# EAGLE board DrinkbotPCB (EAGLE 7.1.0)
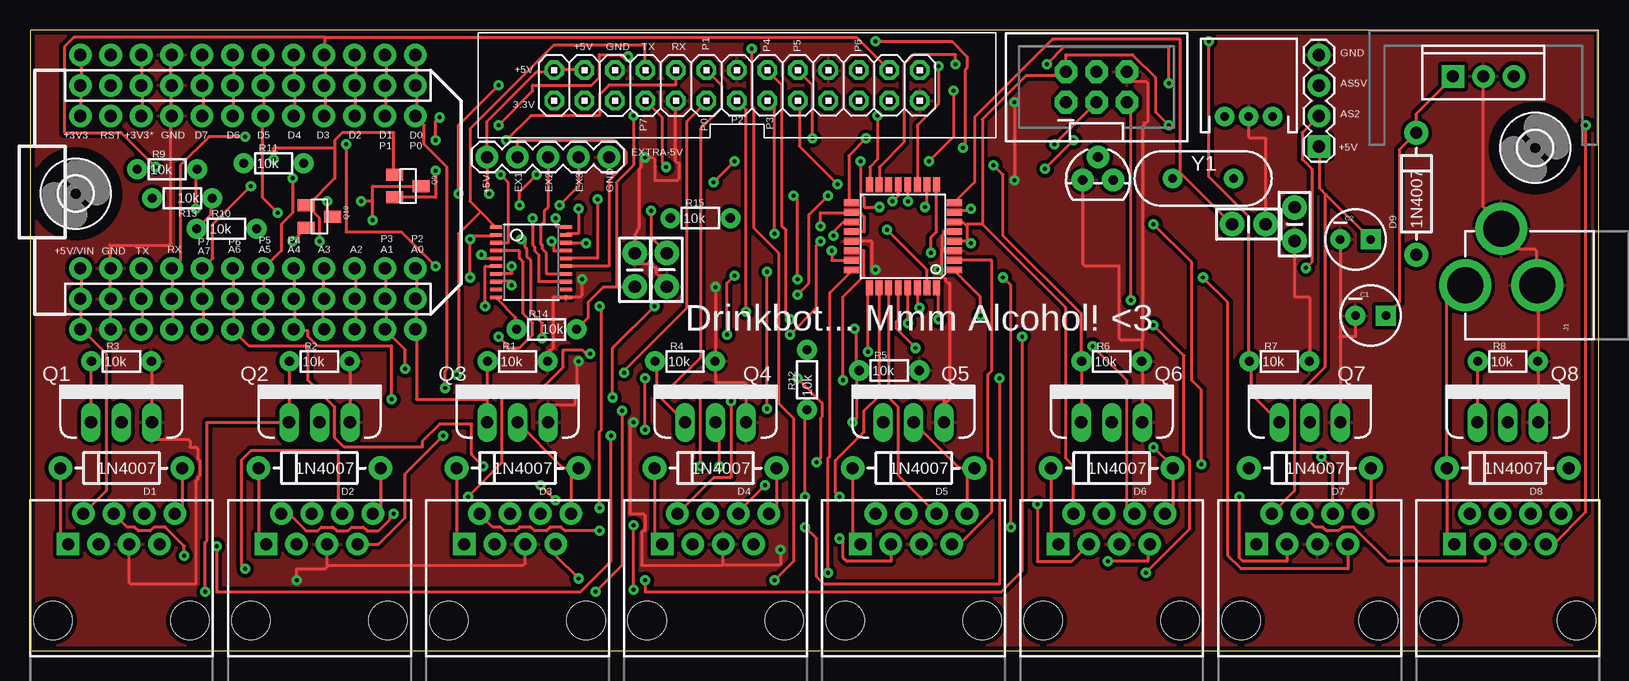
[diagram p0: board, top side]
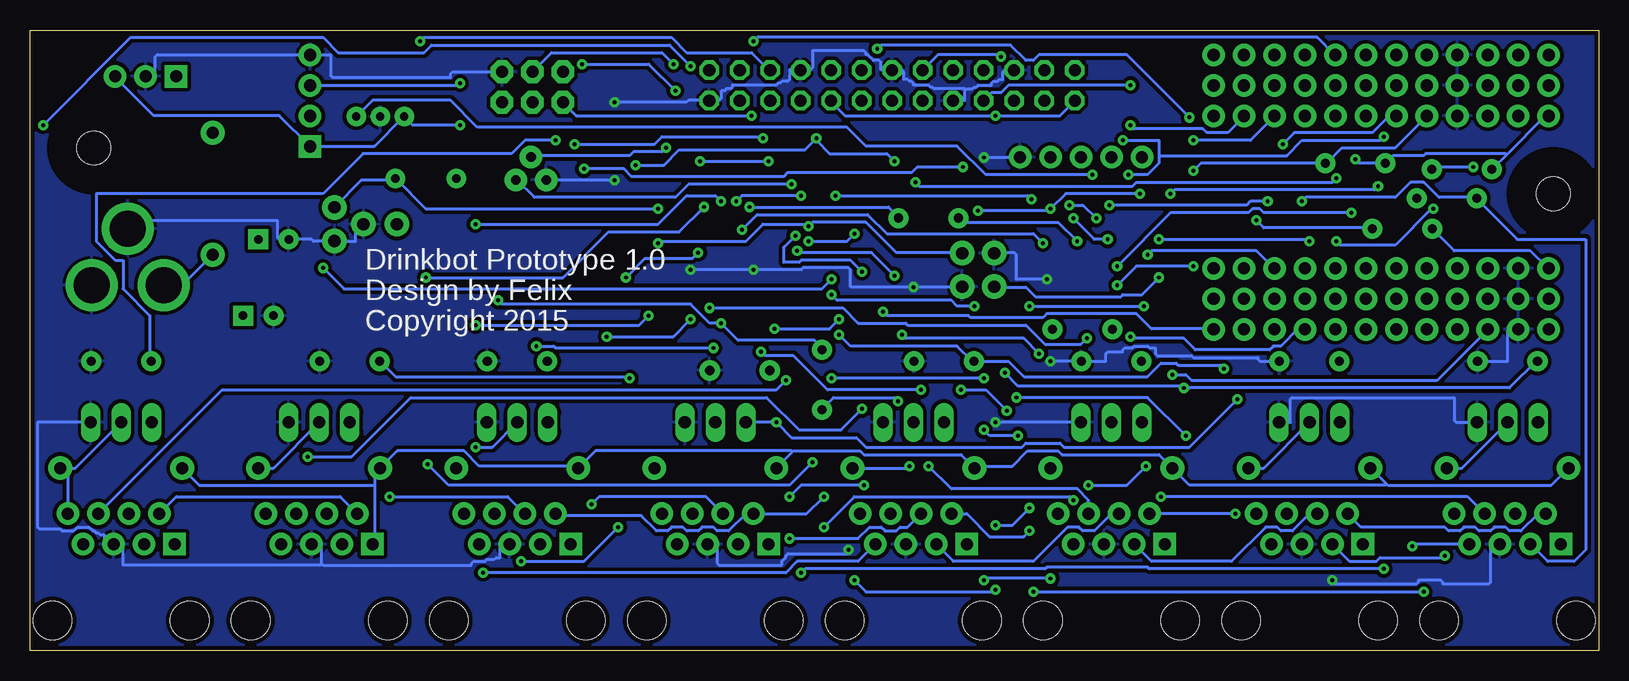
[diagram p1: board, bottom side, seen from below]

Size 130.79 x 51.74 mm. Coordinates in mm from the lower left corner, seen from the top.
Outline: 0,0 130.79,0 130.79,51.74 0,51.74 0,0
Copper layers (1*16): Top 0.0356mm / dielectric 1.5011mm / Bottom 0.0356mm
Design rules "Test2": minimum track width 10mil, minimum drill 13mil, track to track 10mil, track to pad 10mil, pad to pad 10mil, via to via 10mil, smd to smd 10mil, copper to edge 15mil, drill to drill 6mil, minimum pad ring 12mil, minimum via ring 10mil, stop-mask expansion 4mil, vias tented up to drill 15mil, thermal gap 10mil

## Footprints (pad centres in the part's own frame; a part is rotated, then mirrored left to right if it is on the bottom)
CPOL-RADIAL-10UF-25V = drill 0.7 pad 1.651 square: 1 1.27,0 | drill 0.7 pad 1.651: 2 -1.27,0
CAP-PTH-SMALL-KIT = drill 1.016 pad 2.032: 1 -1.397,0; 2 1.397,0
DIODE-1N4001 = drill 1 pad 1.981: A -5.08,0; C 5.08,0
1X05 = drill 1.016 pad 1.88: 1 0,0; 2 2.54,0; 3 5.08,0; 4 7.62,0; 5 10.16,0
2X13 = drill 1.016 octagon: 1 -15.24,-1.27; 2 -15.24,1.27; 3 -12.7,-1.27; 4 -12.7,1.27; 5 -10.16,-1.27; 6 -10.16,1.27; 7 -7.62,-1.27; 8 -7.62,1.27; 9 -5.08,-1.27; 10 -5.08,1.27; 11 -2.54,-1.27; 12 -2.54,1.27; 13 0,-1.27; 14 0,1.27; 15 2.54,-1.27; 16 2.54,1.27; 17 5.08,-1.27; 18 5.08,1.27; 19 7.62,-1.27; 20 7.62,1.27; 21 10.16,-1.27; 22 10.16,1.27; 23 12.7,-1.27; 24 12.7,1.27; 25 15.24,-1.27; 26 15.24,1.27
TO220-IGO = drill 1 pad 1.88: GND 0,0; OUT 2.54,0 | drill 1 pad 1.88 square: IN -2.54,0
POWER_JACK_PTH = drill 2.997 pad 4.318: GND 0,7.7; GNDBREAK 4.7,10.7; PWR 0,13.7
JST-3-PTH = drill 0.7 pad 1.626: 1 -2,-5; 2 0,-5; 3 2,-5
2X3-SHROUDED = drill 1.016 pad 1.88 octagon: 1 -1.27,2.54; 2 1.27,2.54; 3 -1.27,0; 4 1.27,0; 5 -1.27,-2.54; 6 1.27,-2.54
1X04 = drill 1.016 pad 1.88 square: 1 0,0 | drill 1.016 pad 1.88: 2 2.54,0; 3 5.08,0; 4 7.62,0
TO220V = drill 1.016 long: 1 -2.54,0; 2 0,0; 3 2.54,0
SOT23 = smd 1 x 1.4: 1 -0.95,-1.1; 2 0.95,-1.1; 3 0,1.1
1/6W-RES = drill 0.762 pad 1.676: 1 -2.5,0; 2 2.5,0
TQFP32-08 = smd 1.27 x 0.559: 1 -4.293,2.8; 2 -4.293,2; 3 -4.293,1.2; 4 -4.293,0.4; 5 -4.293,-0.4; 6 -4.293,-1.2; 7 -4.293,-2; 8 -4.293,-2.8; 17 4.293,-2.8; 18 4.293,-2; 19 4.293,-1.2; 20 4.293,-0.4; 21 4.293,0.4; 22 4.293,1.2; 23 4.293,2; 24 4.293,2.8 | smd 0.559 x 1.27: 9 -2.8,-4.293; 10 -2,-4.293; 11 -1.2,-4.293; 12 -0.4,-4.293; 13 0.4,-4.293; 14 1.2,-4.293; 15 2,-4.293; 16 2.8,-4.293; 25 2.8,4.293; 26 2,4.293; 27 1.2,4.293; 28 0.4,4.293; 29 -0.4,4.293; 30 -1.2,4.293; 31 -2,4.293; 32 -2.8,4.293
TSSOP20 = smd 0.305 x 0.991: 1 -2.925,-2.918; 2 -2.275,-2.918; 3 -1.625,-2.918; 4 -0.975,-2.918; 5 -0.325,-2.918; 6 0.325,-2.918; 7 0.975,-2.918; 8 1.625,-2.918; 9 2.275,-2.918; 10 2.925,-2.918; 11 2.925,2.918; 12 2.275,2.918; 13 1.625,2.918; 14 0.975,2.918; 15 0.325,2.918; 16 -0.325,2.918; 17 -0.975,2.918; 18 -1.625,2.918; 19 -2.275,2.918; 20 -2.925,2.918
SPARK_CORE_STACKABLE = drill 1.016 pad 1.88: 1 -8.89,13.97; 2 -8.89,11.43; 3 -8.89,8.89; 4 -8.89,6.35; 5 -8.89,3.81; 6 -8.89,1.27; 7 -8.89,-1.27; 8 -8.89,-3.81; 9 -8.89,-6.35; 10 -8.89,-8.89; 11 -8.89,-11.43; 12 -8.89,-13.97; 13 8.89,-13.97; 14 8.89,-11.43; 15 8.89,-8.89; 16 8.89,-6.35; 17 8.89,-3.81; 18 8.89,-1.27; 19 8.89,1.27; 20 8.89,3.81; 21 8.89,6.35; 22 8.89,8.89; 23 8.89,11.43; 24 8.89,13.97; #1 -6.35,13.97; #2 -6.35,11.43; #3 -6.35,8.89; #4 -6.35,6.35; #5 -6.35,3.81; #6 -6.35,1.27; #7 -6.35,-1.27; #8 -6.35,-3.81; #9 -6.35,-6.35; #10 -6.35,-8.89; #11 -6.35,-11.43; #12 -6.35,-13.97; #13 11.43,-13.97; #14 11.43,-11.43; #15 11.43,-8.89; #16 11.43,-6.35; #17 11.43,-3.81; #18 11.43,-1.27; #19 11.43,1.27; #20 11.43,3.81; #21 11.43,6.35; #22 11.43,8.89; #23 11.43,11.43; #24 11.43,13.97; @1 -11.43,13.97; @2 -11.43,11.43; @3 -11.43,8.89; @4 -11.43,6.35; @5 -11.43,3.81; @6 -11.43,1.27; @7 -11.43,-1.27; @8 -11.43,-3.81; @9 -11.43,-6.35; @10 -11.43,-8.89; @11 -11.43,-11.43; @12 -11.43,-13.97; @13 6.35,-13.97; @14 6.35,-11.43; @15 6.35,-8.89; @16 6.35,-6.35; @17 6.35,-3.81; @18 6.35,-1.27; @19 6.35,1.27; @20 6.35,3.81; @21 6.35,6.35; @22 6.35,8.89; @23 6.35,11.43; @24 6.35,13.97
TO-92 = drill 0.813 pad 1.88: 1 -1.27,0; 2 0,1.905; 3 1.27,0
2,8 = hole 2.8: 0,0
RJ45-8 = drill 1 pad 1.88 square: 1 -4.445,6.35 | drill 1 pad 1.88: 2 -3.175,8.89; 3 -1.905,6.35; 4 -0.635,8.89; 5 0.635,6.35; 6 1.905,8.89; 7 3.175,6.35; 8 4.445,8.89 | hole 3.2: -5.715,0; 5.715,0
HC49US = drill 0.7 pad 1.651: 1 -2.54,0; 2 2.54,0

## Placement (x,y rotation side)
C1  10uF  [CPOL-RADIAL-10UF-25V]  111.76,27.94 0 top
C2  10uF  [CPOL-RADIAL-10UF-25V]  110.49,34.29 0 top
C3  22pf  [CAP-PTH-SMALL-KIT]  105.41,35.56 90 top
C4  22pf  [CAP-PTH-SMALL-KIT]  101.6,35.56 180 top
C5  0.1uF  [CAP-PTH-SMALL-KIT]  53.09,31.75 270 top
C6  0.1uF  [CAP-PTH-SMALL-KIT]  50.42,31.75 90 top
D1  1N4007  [DIODE-1N4001]  7.62,15.24 180 top
D2  1N4007  [DIODE-1N4001]  24.13,15.24 180 top
D3  1N4007  [DIODE-1N4001]  40.64,15.24 180 top
D4  1N4007  [DIODE-1N4001]  57.15,15.24 180 top
D5  1N4007  [DIODE-1N4001]  73.66,15.24 180 top
D6  1N4007  [DIODE-1N4001]  90.17,15.24 180 top
D7  1N4007  [DIODE-1N4001]  106.68,15.24 180 top
D8  1N4007  [DIODE-1N4001]  123.19,15.24 180 top
D9  1N4007  [DIODE-1N4001]  115.57,38.1 90 top
EXTRA-5V  [1X05]  48.26,41.15 180 top
GPIO_HEADER1  RPI-GPIO  [2X13]  58.93,47.12 0 top
IC1  L7805-5V  [TO220-IGO]  121.16,47.88 0 top
J1  12V-PWR  [POWER_JACK_PTH]  133.35,30.48 90 top
JP1  RGBLED1  [JST-3-PTH]  101.6,49.53 0 top
JP3  ISP  [2X3-SHROUDED]  88.9,46.99 90 top
JP4  ALCOHOL  [1X04]  107.44,42.04 90 top
Q1  FQP30N06L  [TO220V]  7.62,19.05 0 top
Q2  FQP30N06L  [TO220V]  24.13,19.05 0 top
Q3  FQP30N06L  [TO220V]  40.64,19.05 0 top
Q4  FQP30N06L  [TO220V]  57.15,19.05 0 top
Q5  FQP30N06L  [TO220V]  73.66,19.05 0 top
Q6  FQP30N06L  [TO220V]  90.17,19.05 0 top
Q7  FQP30N06L  [TO220V]  106.68,19.05 0 top
Q8  FQP30N06L  [TO220V]  123.19,19.05 0 top
Q9  BSS138  [SOT23]  31.5,38.73 270 top
Q10  BSS138  [SOT23]  24.13,36.2 270 top
R1  10k  [1/6W-RES]  40.64,24.13 0 top
R2  10k  [1/6W-RES]  24.13,24.13 0 top
R3  10k  [1/6W-RES]  7.62,24.13 0 top
R4  10k  [1/6W-RES]  54.61,24.13 0 top
R5  10k  [1/6W-RES]  71.63,23.37 0 top
R6  10k  [1/6W-RES]  90.17,24.13 0 top
R7  10k  [1/6W-RES]  104.14,24.13 0 top
R8  10k  [1/6W-RES]  123.19,24.13 0 top
R9  10k  [1/6W-RES]  11.43,40.13 0 top
R10  10k  [1/6W-RES]  16.38,35.18 0 top
R11  10k  [1/6W-RES]  20.32,40.64 0 top
R12  10k  [1/6W-RES]  64.77,22.61 90 top
R13  10k  [1/6W-RES]  12.7,37.72 180 top
R14  10k  [1/6W-RES]  43.05,26.8 180 top
R15  10k  [1/6W-RES]  55.88,36.07 0 top
U1  ATMEGA328P  [TQFP32-08]  72.77,34.54 180 top
U2  TXB0108  [TSSOP20]  41.78,32.38 270 top
U$1  SPARK-CORE  [SPARK_CORE_STACKABLE]  18.16,38.23 90 top
U$2  TMP  [TO-92]  89.03,39.24 0 top
U$3  [2,8]  125.48,41.91 0 top
U$7  [2,8]  3.81,38.1 0 top
UNI3  RJ45-8PTH  [RJ45-8]  57.15,2.54 0 top
UNIT0  RJ45-8PTH  [RJ45-8]  7.62,2.54 0 top
UNIT1  RJ45-8PTH  [RJ45-8]  24.13,2.54 0 top
UNIT2  RJ45-8PTH  [RJ45-8]  40.64,2.54 0 top
UNIT4  RJ45-8PTH  [RJ45-8]  73.66,2.54 0 top
UNIT5  RJ45-8PTH  [RJ45-8]  90.17,2.54 0 top
UNIT6  RJ45-8PTH  [RJ45-8]  106.68,2.54 0 top
UNIT7  RJ45-8PTH  [RJ45-8]  123.19,2.54 0 top
Y1  16Mhz  [HC49US]  97.79,39.37 0 top

## Library data of the parts
C1 C2 = SparkFun-Passives
C3-C6 = SparkFun-Capacitors
D1-D9 = SparkFun-DiscreteSemi
EXTRA-5V J1 JP1 JP4 UNI3 UNIT0 UNIT1 UNIT2 UNIT4-UNIT7 = SparkFun-Connectors
GPIO_HEADER1 = rpi-header
IC1 = SparkFun-PowerIC
JP3 = SparkFun-Connectors; PROD_ID: CONN-10681
Q1-Q8 = SparkFun-DiscreteSemi; PROD_ID: TRANS-10060
Q9 Q10 = SparkFun-DiscreteSemi; PROD_ID: TRANS-00830
R1-R15 = SparkFun-Resistors
U1 = SparkFun-DigitalIC; PROD_ID: IC-09069
U2 = adafruit
U$1 = Spark
U$2 = SparkFun-Sensors
U$3 U$7 = holes
Y1 = SparkFun-FreqCtrl

## Nets
+3V3: C6.1 GPIO_HEADER1.1 GPIO_HEADER1.17 Q9.1 Q10.1 R9.1 R11.1 R14.1 U2.2 U$1.24 U$1.#24 U$1.@24 U$2.3
+5V: C2.1 C5.1 EXTRA-5V.5 GPIO_HEADER1.2 GPIO_HEADER1.4 IC1.OUT JP1.1 JP3.2 JP4.1 R10.1 R12.1 R13.1 U1.4 U1.6 U1.18 U1.20 U2.19 U$1.1 U$1.#1 U$1.@1 UNI3.2 UNIT0.2 UNIT1.2 UNIT2.2 UNIT4.2 UNIT5.2 UNIT6.2 UNIT7.2
AP0: U1.23 UNIT0.6
AP1: U1.24 UNIT1.6
AP2: U1.25 UNIT2.6
AP3: U1.26 UNI3.6
AP4: U1.27 UNIT4.6
AP5: U1.28 UNIT5.6
AP6: U1.19 UNIT6.6
AP7: U1.22 UNIT7.6
AS2-3V: U2.5 U$1.10 U$1.#10 U$1.@10
AS2-5V: JP4.2 U2.16
AS3V: U2.4 U$1.9 U$1.#9 U$1.@9
AS5V: R15.1 U2.17
AT-RX: U1.30 U2.20
AT-TX: U1.31 U2.18
DP0: U1.12 UNIT0.7
DP1: U1.13 UNIT1.7
DP2: U1.32 UNIT2.7
DP3: U1.1 UNI3.7
DP4: U1.2 UNIT4.7
DP5: U1.9 UNIT5.7
DP6: U1.10 UNIT6.7
DP7: U1.11 UNIT7.7
EXTRA1-3V3: U2.6 U$1.15 U$1.#15 U$1.@15
EXTRA1-5V: EXTRA-5V.4 U2.15
EXTRA2-3V3: U2.7 U$1.18 U$1.#18 U$1.@18
EXTRA2-5V: EXTRA-5V.3 U2.14
EXTRA3-3V3: U2.8 U$1.19 U$1.#19 U$1.@19
EXTRA3-5V: EXTRA-5V.2 U2.13
GND: C1.2 C2.2 C3.1 C4.1 C5.2 C6.2 EXTRA-5V.1 GPIO_HEADER1.6 GPIO_HEADER1.9 GPIO_HEADER1.14 GPIO_HEADER1.20 GPIO_HEADER1.25 IC1.GND J1.GND J1.GNDBREAK JP1.2 JP3.6 JP4.4 Q1.3 Q2.3 Q3.3 Q4.3 Q5.3 Q6.3 Q7.3 Q8.3 R1.2 R2.2 R3.2 R4.2 R5.2 R6.2 R7.2 R8.2 U1.3 U1.5 U1.21 U2.11 U$1.2 U$1.21 U$1.#2 U$1.#21 U$1.@2 U$1.@21 U$2.1 UNI3.5 UNIT0.5 UNIT1.5 UNIT2.5 UNIT4.5 UNIT5.5 UNIT6.5 UNIT7.5
HV1: JP1.3 Q9.3 R10.2
LEDIN0: Q10.3 R13.2 UNIT0.3
LEDOUT0: UNIT0.4 UNIT1.3
LEDOUT1: UNIT1.4 UNIT2.3
LEDOUT2: UNI3.3 UNIT2.4
LEDOUT3: UNI3.4 UNIT4.3
LEDOUT4: UNIT4.4 UNIT5.3
LEDOUT5: UNIT5.4 UNIT6.3
LEDOUT6: UNIT6.4 UNIT7.3
LEDOUT7: UNIT7.4
LV-RX: GPIO_HEADER1.10 U2.3 U$1.4 U$1.#4 U$1.@4
LV-TX: GPIO_HEADER1.8 U2.1 U$1.3 U$1.#3 U$1.@3
MISO: JP3.1 U1.16
MOSI: JP3.4 U1.15
N$1: C1.1 D9.C IC1.IN
N$2: C3.2 U1.7 Y1.2
N$3: C4.2 U1.8 Y1.1
N$5: R14.2 U2.10
N$7: JP4.3 R15.2
PUMP0: GPIO_HEADER1.11 Q1.1 R3.1 U$1.13 U$1.#13 U$1.@13
PUMP1: GPIO_HEADER1.12 Q2.1 R2.1 U$1.14 U$1.#14 U$1.@14
PUMP2: GPIO_HEADER1.13 Q3.1 R1.1 U$1.12 U$1.#12 U$1.@12
PUMP3: GPIO_HEADER1.15 Q4.1 R4.1 U$1.11 U$1.#11 U$1.@11
PUMP4: GPIO_HEADER1.16 Q5.1 R5.1 U$1.8 U$1.#8 U$1.@8
PUMP5: GPIO_HEADER1.18 Q6.1 R6.1 U$1.7 U$1.#7 U$1.@7
PUMP6: GPIO_HEADER1.22 Q7.1 R7.1 U$1.6 U$1.#6 U$1.@6
PUMP7: GPIO_HEADER1.7 Q8.1 R8.1 U$1.5 U$1.#5 U$1.@5
PUMPLEDS: GPIO_HEADER1.24 Q10.2 R9.2 U$1.16 U$1.#16 U$1.@16
RESET: JP3.5 R12.2 U1.29
RGBLED1: Q9.2 R11.2 U$1.20 U$1.#20 U$1.@20
SCK: JP3.3 U1.17
TEMPSENSOR1: U$1.17 U$1.#17 U$1.@17 U$2.2
VDDA: U$1.22 U$1.#22 U$1.@22
VIN12: D1.C D2.C D3.C D4.C D5.C D6.C D7.C D8.C D9.A J1.PWR UNI3.1 UNIT0.1 UNIT1.1 UNIT2.1 UNIT4.1 UNIT5.1 UNIT6.1 UNIT7.1
VOUTPUMP0: D1.A Q1.2 UNIT0.8
VOUTPUMP1: D2.A Q2.2 UNIT1.8
VOUTPUMP2: D3.A Q3.2 UNIT2.8
VOUTPUMP3: D4.A Q4.2 UNI3.8
VOUTPUMP4: D5.A Q5.2 UNIT4.8
VOUTPUMP5: D6.A Q6.2 UNIT5.8
VOUTPUMP6: D7.A Q7.2 UNIT6.8
VOUTPUMP7: D8.A Q8.2 UNIT7.8

## Tracks (layer width: path | path; a pad name or v marks a point on that pad's centre or on a via)
+3V3  (via drill 0.33)
  Top 0.254: 25.4,41.91 25.4,42.55 26.04,43.18 30.32,43.18 30.32,39.69 Q9.1 | 25.4,41.91 25.4,39.37 23.18,37.15 Q10.1 23.18,36.99 24.13,36.04 v24.13,34.13 | U$1.#24 4.29,49.53 4.29,47.15 U$1.24 4.29,46.99 4.29,44.61 U$1.@24 | 25.4,41.91 20.32,41.91 v20.32,40.96 | v36.67,31.11 v36.67,34.29 36.67,34.61 38.73,34.61 U2.2 | 48.9,30.32 50.32,30.32 C6.1 | 48.9,30.32 47.78,30.32 46.51,29.05 46.51,27.78 45.56,26.83 R14.1 | v67.31,38.89 64.14,42.07 64.14,45.72 GPIO_HEADER1.17 | 48.9,30.32 48.9,39.05 50.32,40.48 v50.32,44.61
  Bottom 0.254: 7.7,41.35 4.6,44.45 4.29,44.45 U$1.@24 | 7.7,41.35 8.89,40.16 R9.1 | 7.7,41.35 7.78,41.43 14.45,41.43 14.61,41.27 17.14,41.27 17.78,40.64 R11.1 20,40.64 v20.32,40.96 | v36.67,31.11 38.1,29.69 39.69,29.69 39.85,29.53 46.99,29.53 47.78,30.32 50.32,30.32 C6.1 | GPIO_HEADER1.1 44.93,44.61 v50.32,44.61 62.87,44.61 63.98,45.72 GPIO_HEADER1.17 | v67.31,38.89 75.88,38.89 76.99,37.78 88.74,37.78 90.17,39.21 U$2.3 | v24.13,34.13 24.29,34.29 v36.67,34.29
+5V  (via drill 0.33)
  Top 0.254: 108.03,38.02 107.47,38.58 107.47,41.91 JP4.1 | 108.03,38.02 C2.1 | UNIT6.2 105.41,13.34 105.41,21.11 107.95,23.65 107.95,37.94 108.03,38.02 | R10.1 13.97,35.24 15.08,36.35 15.08,37.62 R13.1 | U$1.#1 4.29,31.75 4.29,29.37 U$1.1 4.29,29.21 4.29,26.83 | UNIT0.2 6.35,13.34 6.35,24.77 4.29,26.83 | v30.32,11.43 30,11.11 30,10.95 29.05,10 28.1,10 27.78,10.32 26.83,10.32 26.51,10 25.56,10 25.24,10.32 24.29,10.32 23.97,10 23.02,10 21.59,11.43 UNIT1.2 | 4.29,26.83 U$1.@1 | U1.20 68.58,34.92 69.53,34.92 69.53,36.2 69.22,36.51 68.58,36.51 U1.18 68.42,36.51 65.88,36.51 v65.88,35.4 | GPIO_HEADER1.4 46.2,48.42 43.81,48.42 GPIO_HEADER1.2 43.66,48.26 42.23,48.26 38.1,44.13 EXTRA-5V.5 38.1,38.26 v38.26,38.1 | v45.72,36.83 45.72,34.77 44.77,34.77 U2.19 | v51.75,36.67 51.75,34.45 53.02,33.18 C5.1 | 78.11,34.29 78.11,35.4 78.03,35.48 | 78.11,34.29 78.11,34.13 77.15,34.13 U1.4 | 78.03,35.48 77.79,35.72 77.15,35.72 U1.6 | 79.38,35.56 78.11,35.56 78.03,35.48 | 79.38,35.56 79.38,44.29 83.03,47.94 86.36,47.94 JP3.2 86.36,49.69 91.92,49.69 93.82,47.78 93.82,44.93 v94.93,43.81 | v64.61,12.86 64.61,19.84 64.77,20 R12.1 | UNI3.2 56.99,14.45 58.42,14.45 v58.42,20.8 | 79.38,35.56 86.36,28.57 86.36,16.03 87,15.4 UNIT5.2 | 78.11,34.29 v78.42,33.97 | UNIT2.2 38.58,10.32 39.21,10.32 39.53,10 40.48,10 40.8,10.32 41.75,10.32 42.07,10 43.02,10 43.34,10.32 44.29,10.32 44.61,10 v47.47,10
  Bottom 0.254: UNIT6.2 104.93,12.86 118.59,12.86 UNIT7.2 | IC1.OUT 123.67,47.78 120.49,44.61 110.01,44.61 JP4.1 107.31,42.07 102.08,42.07 99.69,44.45 JP1.1 99.54,44.45 98.9,43.81 v94.93,43.81 | UNIT1.2 19.84,10.32 12.86,10.32 12.54,10 11.59,10 11.27,10.32 10.32,10.32 10,10 9.05,10 8.73,10.32 7.78,10.32 7.46,10 6.51,10 5.08,11.43 UNIT0.2 | v30.32,11.43 UNIT2.2 | R10.1 13.81,35.08 12.06,33.34 5.71,33.34 4.29,31.91 U$1.#1 | C5.1 53.18,33.18 58.58,33.18 61.12,35.72 65.56,35.72 v65.88,35.4 65.88,35.56 69.69,35.56 71.12,34.13 78.26,34.13 v78.42,33.97 | v38.26,38.1 44.45,38.1 v45.72,36.83 45.88,36.67 v51.75,36.67 | v64.61,12.86 66.04,11.43 UNIT4.2 71.12,11.43 72.55,10 73.5,10 73.82,10.32 74.77,10.32 75.09,10 76.04,10 76.36,10.32 77.31,10.32 77.63,10 78.58,10 79.85,11.27 86.84,11.27 UNIT5.2 | v58.42,20.8 58.74,21.11 63.82,21.11 64.77,20.16 R12.1 | v47.47,10 47.94,9.53 50.8,9.53 52.7,11.43 UNI3.2
AP0  (via drill 0.33)
  Top 0.254: v66.83,33.34 66.83,32.54 68.42,32.54 U1.23 | v58.74,31.27 58.1,30.64 v58.1,26.35 | v46.67,24.77 46.35,24.77 46.04,25.08 44.45,25.08 44.45,23.65 41.91,21.11 39.37,21.11 39.37,15.72 v36.51,12.86
  Bottom 0.254: v66.83,33.34 66.67,33.18 60.64,33.18 v58.74,31.27 | v58.1,26.35 57.78,26.04 47.94,26.04 v46.67,24.77 | v36.51,12.86 10.95,12.86 UNIT0.6
AP1  (via drill 0.33)
  Top 0.254: v66.52,6.51 66.52,16.03 66.67,16.19 66.67,29.84 68.42,31.59 U1.24 | v17.94,6.83 17.62,7.14 17.62,15.88 18.41,16.67 25.72,16.67 25.72,11.75 UNIT1.6
  Bottom 0.254: v66.52,6.51 66.2,6.83 46.2,6.83 46.04,6.99 37.62,6.99 37.47,6.83 v17.94,6.83
AP2  (via drill 0.33)
  Top 0.254: v69.85,24.92 69.85,30.16 U1.25 | v56.52,21.75 55.88,21.11 v55.88,15.4
  Bottom 0.254: v69.85,24.92 69.53,24.61 67.15,24.61 64.29,21.75 v56.52,21.75 | v55.88,15.4 53.98,13.49 43.5,13.49 42.55,12.54 UNIT2.6
AP3  (via drill 0.33)
  Top 0.254: v67.47,12.86 67.15,13.18 67.15,15.88 69.53,18.26 69.53,20 70.8,21.27 70.8,30.16 U1.26 | v61.28,13.81 59.05,11.59 UNI3.6
  Bottom 0.254: v67.47,12.86 66.52,13.81 v61.28,13.81
AP4
  Top 0.254: UNIT4.6 72.39,14.61 72.39,20.32 71.6,21.11 71.6,30.16 U1.27
AP5  (via drill 0.33)
  Top 0.254: v73.82,25.24 72.23,26.83 72.23,27.46 72.39,27.62 72.39,30.16 U1.28 | v88.58,25.4 91.44,22.54 91.44,12.06 UNIT5.6
  Bottom 0.254: v73.82,25.24 87,25.24 87.15,25.4 v88.58,25.4
AP6  (via drill 0.33)
  Top 0.254: v66.99,34.61 66.99,34.92 67.79,35.72 68.42,35.72 U1.19 | v61.44,20.16 v61.44,31.59 | v107.63,16.19 108.58,15.24 UNIT6.6
  Bottom 0.254: v66.99,34.61 67.94,33.66 67.94,32.38 66.67,32.38 66.52,32.54 62.39,32.54 v61.44,31.59 | v61.44,20.16 63.18,18.41 66.67,18.41 69.37,21.11 99.06,21.11 103.98,16.19 v107.63,16.19
AP7  (via drill 0.33)
  Top 0.254: v67.79,22.54 67.79,29.53 69.53,31.27 69.53,33.34 68.58,33.34 U1.22
  Bottom 0.254: v67.79,22.54 68.58,21.75 114.78,21.75 UNIT7.6
AS2-3V  (via drill 0.33)
  Top 0.254: U$1.@10 27.15,26.83 27.15,29.21 U$1.10 27.15,29.37 27.15,31.75 U$1.#10 | v37.62,33.02 37.62,32.7 38.73,32.7 U2.5
  Bottom 0.254: v37.62,33.02 37.31,33.34 28.57,33.34 27.15,31.91 U$1.#10
AS2-5V  (via drill 0.33)
  Top 0.254: v47.31,37.62 47.31,32.7 44.77,32.7 U2.16 | v63.66,37.94 63.98,37.62 v63.98,30.96 | v106.36,31.91 106.84,32.38 106.84,40.16 106.05,40.96 106.05,43.18 JP4.2
  Bottom 0.254: v47.31,37.62 47.62,37.94 v63.66,37.94 | v63.98,30.96 64.77,30.16 104.62,30.16 v106.36,31.91
AS3V  (via drill 0.33)
  Top 0.254: U$1.#9 24.45,31.75 24.45,29.37 U$1.9 24.45,29.21 24.45,26.83 U$1.@9 | v39.05,26.19 39.69,25.56 39.69,25.24 40.8,25.24 41.91,26.35 41.91,27.3 41.12,28.1 41.12,32.38 40.8,32.7 40.8,33.34 38.89,33.34 U2.4
  Bottom 0.254: v39.05,26.19 38.89,26.04 34.61,26.04 33.66,25.08 27.46,25.08 27.15,25.4 26.51,25.4 25.08,26.83 24.61,26.83 U$1.@9
AS5V  (via drill 0.33)
  Top 0.254: v43.5,34.13 43.66,33.97 43.66,33.34 44.61,33.34 U2.17
  Bottom 0.254: v43.5,34.13 45.09,35.72 53.02,35.72 53.34,36.04 R15.1
AT-RX  (via drill 0.33)
  Top 0.254: v43.81,36.04 43.81,35.4 44.61,35.4 U2.20 | v40.96,34.29 41.27,33.97 41.27,33.66 41.43,33.5 41.43,32.86 41.75,32.54 41.75,28.26 42.7,27.3 v42.7,26.04 | v74.14,28.57 73.98,28.73 73.98,30.16 U1.30
  Bottom 0.254: v43.81,36.04 42.07,34.29 v40.96,34.29 | v42.7,26.04 43.18,25.56 46.2,25.56 47.78,27.15 57.63,27.15 57.78,27.3 61.75,27.3 63.02,28.57 v74.14,28.57
AT-TX  (via drill 0.33)
  Top 0.254: v46.35,33.97 44.77,33.97 U2.18 | v71.44,35.08 74.77,31.75 74.77,30.32 U1.31
  Bottom 0.254: v46.35,33.97 47.15,34.77 59.37,34.77 60.96,36.35 70.17,36.35 v71.44,35.08
DP0  (via drill 0.33)
  Top 0.254: v73.18,37.47 73.18,38.73 U1.12 | v93.66,35.56 96.84,32.38 96.84,22.54 97.63,21.75 v97.63,15.56 | v65.56,15.72 65.88,16.03 65.88,19.37 66.04,19.53 66.04,20.64 v63.98,22.7 | v51.28,18.41 v51.28,22.7 | v48.42,17.94 48.42,7.46 45.88,4.92 15.56,4.92 v15.56,8.73
  Bottom 0.254: v73.18,37.47 73.66,37.94 76.04,37.94 78.42,35.56 v93.66,35.56 | v97.63,15.56 95.89,13.81 67.47,13.81 v65.56,15.72 | v51.28,22.7 v63.98,22.7 | v51.28,18.41 50.8,17.94 v48.42,17.94 | v15.56,8.73 15.4,8.89 UNIT0.7
DP1  (via drill 0.33)
  Top 0.254: v71.91,37.47 72.39,37.94 72.39,38.73 U1.13 | v66.52,37.94 64.93,36.35 64.93,30.64 v63.98,29.69 | v52.07,28.73 48.58,25.24 v48.58,21.11 | v34.45,17.94 31.27,14.76 31.27,11.11 29.05,8.89 UNIT1.7
  Bottom 0.254: v71.91,37.47 71.44,37.94 v66.52,37.94 | v63.98,29.69 63.5,29.21 53.98,29.21 53.5,28.73 v52.07,28.73 | v48.58,21.11 37.62,21.11 v34.45,17.94
DP2  (via drill 0.33)
  Top 0.254: v75.72,27.62 75.72,30.16 U1.32 | v82.71,26.19 82.71,6.67 80.96,4.92 51.28,4.92 v51.28,5.87 | v45.72,6.03 43.81,7.94 UNIT2.7
  Bottom 0.254: v75.72,27.62 77.15,26.19 v82.71,26.19 | v51.28,5.87 51.12,6.03 v45.72,6.03
DP3  (via drill 0.33)
  Top 0.254: v79.22,27.94 79.22,29.53 77.15,31.59 U1.1 | v93.66,27.15 96.2,24.61 96.2,16.35 96.68,15.88 96.68,10.16 v93.03,6.51
  Bottom 0.254: v79.22,27.94 80.01,27.15 v93.66,27.15 | v93.03,6.51 67.79,6.51 66.83,7.46 61.75,7.46 UNI3.7
DP4
  Top 0.254: UNIT4.7 77.47,8.89 80.17,11.59 80.17,15.88 79.85,16.19 79.85,23.02 80.17,23.34 80.17,32.54 77.15,32.54 U1.2
DP5  (via drill 0.33)
  Top 0.254: v75.09,33.18 75.09,34.45 75.56,34.92 75.56,38.73 U1.9 | v81.12,31.11 81.76,30.48 v81.76,10.32 | v89.85,7.46 93.19,7.46 93.19,8.73 UNIT5.7
  Bottom 0.254: v75.09,33.18 75.56,32.7 79.53,32.7 v81.12,31.11 | v81.76,10.32 84.61,7.46 v89.85,7.46
DP6  (via drill 0.33)
  Top 0.254: v74.61,36.99 74.77,37.15 74.77,38.73 U1.10 | v97.79,31.11 99.85,29.05 99.85,7.94 100.97,6.83 109.86,6.83 UNIT6.7
  Bottom 0.254: v74.61,36.99 76.68,34.92 82.55,34.92 86.36,31.11 v97.79,31.11
DP7  (via drill 0.33)
  Top 0.254: v75.72,48.74 75.72,45.56 73.98,43.81 73.98,38.89 U1.11 | v129.7,43.81 129.7,11.59 127,8.89 UNIT7.7
  Bottom 0.254: v75.72,48.74 77.47,50.48 97.31,50.48 97.95,49.85 105.09,49.85 106.36,51.12 122.4,51.12 v129.7,43.81
EXTRA1-3V3  (via drill 0.33)
  Top 0.254: U$1.#15 27.15,49.53 27.15,47.15 U$1.15 27.15,46.99 27.15,44.61 U$1.@15 | v37.94,28.73 37.94,32.07 38.73,32.07 U2.6 | v47.47,28.73 47.62,28.57 47.62,18.41 47.47,18.26 v47.47,11.91 | v50.32,5.08 v50.32,10.48 | v62.07,5.87 63.66,7.46 63.66,19.37 62.39,20.64 62.39,33.18 60.33,35.24 60.33,45.24 60.17,45.4 v60.17,50.16 | v34.13,44.45 33.81,44.13 v33.81,42.55
  Bottom 0.254: v47.47,28.73 v37.94,28.73 | v47.47,11.91 48.9,10.48 v50.32,10.48 | v50.32,5.08 50.48,4.92 61.12,4.92 v62.07,5.87 | v60.17,50.16 59.85,50.48 49.05,50.48 47.78,49.21 47.15,49.21 46.67,49.69 39.37,49.69 v34.13,44.45 | v33.81,42.55 29.05,42.55 27.15,44.45 U$1.@15
EXTRA1-5V
  Top 0.254: EXTRA-5V.4 40.64,42.55 48.74,42.55 49.69,41.59 49.69,40.64 48.26,39.21 48.26,32.07 44.77,32.07 U2.15
EXTRA2-3V3  (via drill 0.33)
  Top 0.254: U$1.#18 19.53,49.53 19.53,47.15 U$1.18 19.53,46.99 19.53,44.61 U$1.@18 19.37,44.45 19.37,37.78 v20.64,36.51 | v40.16,32.07 40.16,31.43 38.89,31.43 U2.7
  Bottom 0.254: v40.16,32.07 35.72,36.51 29.21,36.51 28.89,36.83 28.26,36.83 27.94,36.51 v20.64,36.51
EXTRA2-5V
  Top 0.254: EXTRA-5V.3 43.18,36.99 42.86,36.67 42.86,35.72 42.55,35.4 42.55,33.97 42.7,33.81 42.7,33.5 43.02,33.18 43.02,31.43 44.61,31.43 U2.14
EXTRA3-3V3  (via drill 0.33)
  Top 0.254: U$1.#19 16.99,49.53 16.99,47.15 U$1.19 16.99,46.99 16.99,44.61 U$1.@19 | v40.16,30.48 40.16,30.8 38.89,30.8 U2.8 | v33.81,32.07 30.96,34.92 26.35,34.92 v26.35,42.23
  Bottom 0.254: v40.16,30.48 38.58,32.07 v33.81,32.07 | v26.35,42.23 25.4,43.18 18.89,43.18 17.62,44.45 16.99,44.45 U$1.@19
EXTRA3-5V  (via drill 0.33)
  Top 0.254: v41.91,36.04 41.91,33.81 42.07,33.66 42.07,33.34 42.39,33.02 42.39,30.8 44.61,30.8 U2.13 | v44.13,37.15 45.72,38.73 EXTRA-5V.2
  Bottom 0.254: v41.91,36.04 43.02,37.15 v44.13,37.15
GND  (via drill 0.33)
  Top 0.254: JP1.2 101.6,42.86 101.76,42.7 103.03,42.7 103.03,35.56 C4.1 | Q7.3 109.22,26.04 109.3,26.11 | 109.3,26.11 109.38,26.19 110.49,26.19 C1.2 | C3.1 105.41,29.53 106.52,29.53 106.68,29.37 106.68,24.13 R7.2 | C2.2 109.22,26.19 109.3,26.11 | 92.71,24.13 Q6.3 | 92.71,25.88 90.96,25.88 90.81,26.04 90.81,32.07 87.95,32.07 87.79,32.23 87.79,39.21 U$2.1 | 92.71,24.13 92.71,25.88 | 92.71,24.13 R6.2 | Q8.3 125.73,23.81 R8.2 125.73,24.45 125.73,28.57 125.57,28.73 125.57,30.48 | IC1.GND 121.13,47.78 121.13,36.99 121.28,36.83 122.71,36.83 122.71,35.24 J1.GNDBREAK 122.71,35.08 122.71,33.5 125.41,33.5 125.57,33.34 125.57,30.48 | 125.57,30.48 J1.GND | 92.71,25.88 92.71,43.66 92.87,43.81 92.87,43.97 93.03,43.97 93.19,44.13 93.19,47.31 93.03,47.47 91.44,47.47 JP3.6 | U$1.#21 11.75,49.53 11.75,47.15 U$1.21 11.75,46.99 11.75,44.61 U$1.@21 11.75,44.45 11.75,33.97 11.59,33.81 6.67,33.81 6.67,31.91 U$1.#2 6.67,31.75 6.67,29.37 U$1.2 6.67,29.21 6.67,26.83 U$1.@2 | R3.2 10.16,24.13 Q1.3 10.16,17.62 13.18,17.62 13.34,17.46 13.34,16.99 13.81,16.99 13.97,16.83 13.97,16.03 14.13,15.88 14.13,14.61 13.97,14.45 13.97,14.29 13.81,14.13 13.81,5.56 8.41,5.56 8.26,5.71 UNIT0.5 | 24.77,7.14 24.77,6.99 24.61,6.83 22.23,6.83 v22.23,5.87 | 24.77,7.14 UNIT1.5 | UNIT2.5 41.27,7.3 41.12,7.14 24.77,7.14 | 76.12,33.58 76.04,33.66 76.04,34.61 76.2,34.77 76.2,34.92 76.99,34.92 U1.5 | 76.12,33.58 76.2,33.5 76.2,33.34 76.99,33.34 U1.3 | 76.04,31.75 76.04,31.27 76.36,30.96 76.36,30.8 76.52,30.64 76.68,30.64 76.68,20.95 76.52,20.8 76.2,20.8 | 76.04,31.75 76.04,33.5 76.12,33.58 | Q5.3 76.2,20.8 | 76.2,20.8 76.2,20.95 74.3,20.95 74.14,21.11 74.14,23.34 R5.2
  Top 0.254: Q4.3 59.69,22.23 59.53,22.38 57.15,22.38 57.15,24.13 | v70.48,31.75 70.33,31.75 70.17,31.91 70.17,34.13 68.58,34.13 U1.21 | v57.15,30.32 57.15,24.13 | 57.15,24.13 R4.2 | C5.2 53.02,30.48 53.02,31.27 52.39,31.27 52.23,31.43 52.23,31.91 52.07,31.91 51.91,32.07 51.91,32.23 50.64,32.23 50.48,32.38 50.48,33.02 C6.2 50.48,33.18 50.48,34.77 50.64,34.92 50.64,35.08 50.8,35.24 50.8,40.16 50.96,40.32 50.96,41.12 v51.28,41.12 51.91,41.12 52.07,40.96 52.07,39.21 53.98,39.21 54.13,39.37 54.13,40.64 53.98,40.64 53.82,40.8 53.82,45.72 GPIO_HEADER1.9 | v75.72,31.75 76.04,31.75 | UNI3.5 57.78,7.3 57.86,7.22 | 57.86,7.22 57.94,7.14 62.55,7.14 v62.55,8.41 | Q2.3 26.67,24.13 R2.2 | R1.2 43.18,24.13 43.18,24.92 43.34,25.08 43.5,25.08 43.66,25.24 43.66,29.53 44.61,29.53 U2.11 44.77,29.53 45.88,29.53 46.04,29.69 v46.04,30.96 | Q3.3 43.18,20.32 43.34,20.48 45.4,20.48 45.4,20.95 45.56,21.11 45.56,23.97 v45.72,24.13 | v50.32,19.05 50.16,19.05 50.01,18.89 50.01,11.43 51.12,11.43 51.28,11.27 51.28,10 51.12,10 50.96,9.84 50.96,7.14 57.78,7.14 57.86,7.22 | v82.07,45.72 v82.07,39.21
  Top 0.813: R8.2 125.73,24.13
  Bottom 0.254: UNIT5.5 91.44,8.89 91.6,8.73 91.6,7.78 91.92,7.78 92.08,7.62 92.71,7.62 92.87,7.46 93.82,7.46 93.98,7.3 93.98,7.14 106.36,7.14 106.44,7.22 | 106.44,7.22 106.52,7.3 106.52,8.89 UNIT6.5 | 106.44,7.22 106.52,7.14 123.03,7.14 123.03,8.73 123.19,8.89 UNIT7.5 124.46,8.89 124.62,9.05 124.62,9.68 124.94,9.68 125.09,9.84 125.25,9.84 125.41,10 125.57,10 125.89,10.32 126.84,10.32 127.16,10 128.11,10 128.27,10.16 130.02,10.16 130.18,10.32 130.18,19.05 Q8.3 | 105.41,34.13 107.16,34.13 107.31,34.29 C2.2 110.01,34.29 110.17,34.45 110.17,35.88 120.81,35.88 120.97,35.72 120.97,35.24 122.56,35.24 J1.GNDBREAK | C4.1 103.5,35.56 103.66,35.4 103.66,34.13 105.41,34.13 | 105.41,34.13 C3.1 | JP3.6 95.57,48.26 95.73,48.1 95.73,47.78 105.57,47.78 105.73,47.94 105.73,49.69 107.31,49.69 JP4.4 107.47,49.69 120.17,49.69 120.33,49.53 120.33,47.94 121.13,47.94 IC1.GND | v22.23,5.87 22.23,5.56 15.24,5.56 15.08,5.71 15.08,5.87 13.18,5.87 13.02,5.71 13.02,5.56 9.21,5.56 9.05,5.71 9.05,8.89 UNIT0.5 | R3.2 7.62,24.13 7.62,26.67 7.46,26.83 6.83,26.83 U$1.@2 | 52.78,46.75 52.86,46.67 52.86,45.88 53.82,45.88 GPIO_HEADER1.9 | 52.78,46.75 52.7,46.83 52.23,46.83 52.07,46.99 51.91,46.99 51.75,47.15 50.64,47.15 50.64,47.31 50.48,47.47 50.16,47.47 50.01,47.62 49.69,47.62 49.69,48.26 49.53,48.42 48.9,48.42 GPIO_HEADER1.6 | 52.78,46.75 52.86,46.83 55.4,46.83 55.56,46.99 55.72,46.99 55.88,47.15 57.15,47.15 57.15,47.31 57.31,47.47 57.47,47.47 57.63,47.62 57.94,47.62 57.94,48.26 58.1,48.42 58.9,48.42 GPIO_HEADER1.14 59.05,48.42 59.85,48.42 59.85,49.05 60.01,49.21 60.48,49.21 60.96,49.69 61.12,49.69 61.12,49.85 61.28,50.01 65.56,50.01 65.56,48.58 65.72,48.42 66.52,48.42 GPIO_HEADER1.20 66.67,48.42 67.47,48.42 67.47,47.62 67.63,47.47 68.1,47.47 68.26,47.31 68.42,47.31 68.58,47.15 72.23,47.15 72.23,46.99 72.39,46.83 72.71,46.83 72.87,46.67 73.18,46.67 73.18,46.04 73.34,45.88 74.14,45.88 GPIO_HEADER1.25 74.3,45.88 75.88,45.88 76.04,45.72 v82.07,45.72
  Bottom 0.254: v51.28,41.12 48.26,41.12 EXTRA-5V.1 | C5.2 53.18,30.32 v57.15,30.32 62.39,30.32 62.39,31.75 62.55,31.91 66.36,31.91 66.52,31.75 v70.48,31.75 v75.72,31.75 | v62.55,8.41 62.55,8.1 67.63,8.1 67.79,7.94 67.79,7.78 68.1,7.46 68.1,7.14 73.34,7.14 73.5,7.3 73.5,8.89 UNIT4.5 | v45.72,24.13 R1.2 41.12,24.13 41.12,24.77 40.96,24.92 39.69,24.92 39.69,25.08 39.53,25.24 38.89,25.24 38.73,25.4 37.62,25.4 37.47,25.24 36.99,25.24 36.99,24.77 36.83,24.61 33.97,24.61 33.81,24.45 28.42,24.45 28.42,24.29 28.26,24.13 R2.2 | Q3.3 v50.32,19.05 | v46.04,30.96 48.58,30.96 48.58,33.02 48.74,33.18 50.32,33.18 C6.2 | Q1.3 11.91,19.05 12.06,19.21 12.06,21.11 25.56,21.11 25.72,20.95 25.72,19.05 Q2.3 | v82.07,39.21 87.63,39.21 U$2.1
  pour Top (isolate 0.305): 0,52.07 130.81,52.07 130.81,0 0,0
  pour Bottom (isolate 0.305): 0,52.07 130.81,52.07 130.81,0 0,0
HV1  (via drill 0.33)
  Top 0.254: Q9.3 28.57,38.73 28.57,37.47 | v28.57,35.88 28.57,37.47 | v42.23,39.69 40.8,38.26 v40.8,37.15 | 28.57,37.47 v27.62,37.47
  Bottom 0.254: v28.57,35.88 27.94,35.24 18.89,35.24 R10.2 | v42.23,39.69 51.12,39.69 53.5,42.07 61.12,42.07 62.71,43.66 93.5,43.66 95.73,45.88 102.23,45.88 103.5,44.61 JP1.3 | v40.8,37.15 29.37,37.15 29.05,37.47 v27.62,37.47
LEDIN0  (via drill 0.33)
  Top 0.254: v24.77,37.47 24.77,36.51 25.08,36.2 Q10.3
  Bottom 0.254: v24.77,37.47 24.45,37.78 16.99,37.78 15.72,39.05 14.61,39.05 13.34,37.78 10.32,37.78 R13.2 10.16,37.62 6.83,34.29 1.11,34.29 1.11,8.41 2.06,7.46 4.29,7.46 UNIT0.3
LEDOUT0  (via drill 0.33)
  Top 0.254: UNIT0.4 8.1,10.32 8.73,10.32 9.05,10 10,10 10.32,10.32 11.27,10.32 12.86,8.73 v12.86,7.94
  Bottom 0.254: v12.86,7.94 13.02,7.78 18.26,7.78 18.57,7.46 20.8,7.46 UNIT1.3
LEDOUT1
  Bottom 0.254: UNIT2.3 37.31,7.46 30.64,7.46 27.78,10.32 26.83,10.32 26.51,10 25.56,10 24.13,11.43 UNIT1.4
LEDOUT2
  Bottom 0.254: UNI3.3 53.82,7.46 47.15,7.46 44.29,10.32 43.34,10.32 43.02,10 42.07,10 40.64,11.43 UNIT2.4
LEDOUT3  (via drill 0.33)
  Top 0.254: v67.47,9.37 67.79,9.05 67.79,7.78 68.1,7.46 71.75,7.46 UNIT4.3
  Bottom 0.254: UNI3.4 57.63,10.32 58.26,10.32 58.58,10 59.53,10 59.85,10.32 60.8,10.32 61.75,9.37 v67.47,9.37
LEDOUT4  (via drill 0.33)
  Top 0.254: UNIT5.3 86.84,7.46 83.98,7.46 v83.98,12.22
  Bottom 0.254: v83.98,12.22 83.34,12.86 74.45,12.86 UNIT4.4
LEDOUT5  (via drill 0.33)
  Top 0.254: v100.81,12.86 100.81,7.78 101.12,7.46 104.78,7.46 UNIT6.3
  Bottom 0.254: UNIT5.4 90.96,12.86 v100.81,12.86
LEDOUT6
  Top 0.254: UNIT6.4 107.16,10.32 107.79,10.32 108.11,10 109.06,10 109.38,10.32 110.33,10.32 113.19,7.46 121.28,7.46 UNIT7.3
LV-RX  (via drill 0.33)
  Top 0.254: U$1.@4 11.91,26.83 11.91,29.21 U$1.4 11.91,29.37 11.91,31.75 U$1.#4 11.91,31.91 12.54,32.54 12.54,40.48 14.92,42.86 v17.94,42.86 | v39.21,39.69 39.85,39.05 39.85,33.97 38.89,33.97 U2.3 | v39.69,42.55 41.75,44.61 47.47,44.61 47.47,46.35 48.26,47.15 53.82,47.15 53.82,48.26 GPIO_HEADER1.10
  Bottom 0.254: v39.21,39.69 37.62,39.69 36.67,40.64 36.67,41.27 | 36.67,41.27 36.67,42.55 v39.69,42.55 | v17.94,42.86 18.26,42.55 24.77,42.55 26.04,41.27 36.67,41.27
LV-TX  (via drill 0.33)
  Top 0.254: U$1.@3 9.37,26.83 9.37,29.21 U$1.3 9.37,29.37 9.37,31.75 U$1.#3 | 37.54,36.59 36.67,37.47 36.67,43.5 43.66,50.48 51.28,50.48 51.28,48.42 GPIO_HEADER1.8 | 37.54,36.59 38.73,35.4 U2.1 | v35.56,23.02 35.72,23.18 35.72,34.77 37.54,36.59
  Bottom 0.254: v35.56,23.02 34.45,23.02 33.97,22.54 13.49,22.54 9.37,26.67 U$1.@3
MISO  (via drill 0.33)
  Top 0.254: v70.64,44.61 70.64,40.96 70.01,40.32 70.01,38.89 U1.16
  Bottom 0.254: v70.64,44.61 85.25,44.61 JP3.1
MOSI  (via drill 0.33)
  Top 0.254: v77.15,48.9 77.15,49.69 73.66,49.69 72.87,48.9 72.87,42.39 70.8,40.32 70.8,38.89 U1.15
  Bottom 0.254: v77.15,48.9 78.11,49.85 87.31,49.85 JP3.4
N$1
  Top 0.254: C1.1 114.14,29.05 114.14,41.75 D9.C 115.57,44.77 118.59,47.78 IC1.IN
N$2  (via drill 0.33)
  Top 0.254: v78.42,36.83 78.42,36.67 77.15,36.67 U1.7
  Bottom 0.254: v78.42,36.83 97.79,36.83 Y1.2 100.33,39.21 103.19,39.21 105.41,36.99 C3.2
N$3
  Top 0.254: U1.8 77.15,37.47 78.74,39.05 78.74,44.45 85.25,50.96 95.89,50.96 95.89,40.01 Y1.1 95.89,39.85 100.17,35.56 C4.2
N$5
  Top 0.254: U2.10 38.89,29.37 40.48,27.78 40.48,26.83 R14.2
N$7  (via drill 0.33)
  Top 0.254: v70.8,36.99 69.53,36.99 69.53,37.78 69.22,38.1 v69.22,40.8 | v74.93,40.8 76.99,42.86 v76.99,46.67 | v84.77,48.9 86.2,50.32 94.93,50.32 v94.93,47.31
  Bottom 0.254: v70.8,36.99 59.21,36.99 58.42,36.2 R15.2 | v74.93,40.8 v69.22,40.8 | v76.99,46.67 79.22,48.9 v84.77,48.9 | v94.93,47.31 95.09,47.15 107.31,47.15 JP4.3
PUMP0  (via drill 0.33)
  Top 0.254: U$1.#13 32.23,49.53 32.23,47.15 U$1.13 32.23,46.99 32.23,44.61 U$1.@13 32.23,44.45 32.86,43.81 32.86,42.23 34.77,40.32 34.77,23.5 34.61,23.34 v34.61,21.91 | Q1.1 5.08,24.13 R3.1 | v49.53,23.18 49.53,23.34 54.77,28.57 54.77,44.13 56.36,45.72 GPIO_HEADER1.11
  Bottom 0.254: v49.53,23.18 48.42,22.07 34.61,22.07 | 34.61,22.07 34.29,22.07 34.13,21.91 7.46,21.91 5.24,24.13 R3.1 | 34.61,22.07 v34.61,21.91
PUMP1  (via drill 0.33)
  Top 0.254: R2.1 21.59,24.13 Q2.1 14.76,19.05 14.76,9.21 14.61,9.05 v14.61,4.92 | U$1.#14 29.69,49.53 29.69,47.15 U$1.14 29.69,46.99 29.69,44.61 U$1.@14 | v49.85,49.53 49.37,49.53 49.21,49.69 47.47,49.69 47.47,47.78 46.83,47.15 41.91,47.15 41.91,46.67 v39.05,43.81 | v47.15,4.92 49.37,7.14 v49.37,20 | v53.18,21.75 55.88,24.45 55.88,43.5 57.63,45.24 57.63,47.15 GPIO_HEADER1.12
  Bottom 0.254: GPIO_HEADER1.12 55.09,49.69 50.01,49.69 v49.85,49.53 | v39.05,43.81 38.73,43.5 33.02,43.5 32.7,43.18 30.96,43.18 29.69,44.45 U$1.@14 | v47.15,4.92 v14.61,4.92 | v49.37,20 51.12,21.75 v53.18,21.75
PUMP2  (via drill 0.33)
  Top 0.254: 38.1,20.95 38.1,24.13 R1.1 | 38.1,20.95 Q3.1 | U$1.#12 32.23,31.75 32.23,29.37 U$1.12 32.23,29.21 32.23,26.83 U$1.@12 32.23,26.67 32.23,20.95 38.1,20.95 | GPIO_HEADER1.13 59.69,45.09 v59.69,28.26
  Bottom 0.254: v59.69,28.26 59.37,27.94 52.55,27.94 52.39,27.78 46.35,27.78 46.04,28.1 38.58,28.1 37.31,26.83 32.23,26.83 U$1.@12
PUMP3  (via drill 0.33)
  Top 0.254: U$1.#11 29.69,31.75 29.69,29.37 U$1.11 29.69,29.21 29.69,26.83 U$1.@11 29.69,26.67 31.27,25.08 v31.27,23.5 | Q4.1 52.23,21.43 52.23,24.13 R4.1 | GPIO_HEADER1.15 62.07,45.24 v62.07,34.77 | v65.88,34.13 65.56,33.81 65.56,28.57 v63.34,26.35
  Bottom 0.254: v62.07,34.77 62.71,34.13 v65.88,34.13 | v63.34,26.35 62.39,25.4 53.5,25.4 52.23,24.13 R4.1 49.21,24.13 47.94,22.86 37.62,22.86 36.51,23.97 35.24,23.97 35.08,23.81 31.59,23.81 v31.27,23.5
PUMP4  (via drill 0.33)
  Top 0.254: U$1.#8 22.07,31.75 22.07,29.37 U$1.8 22.07,29.21 22.07,26.83 U$1.@8 22.07,26.67 23.18,26.67 23.18,26.19 23.97,25.4 30.16,25.4 v30.16,20.95 | GPIO_HEADER1.16 62.71,47.15 62.71,35.4 63.02,35.08 63.02,27.94 v63.34,27.62 | v68.74,26.83 68.9,26.67 68.9,23.65 69.06,23.5 R5.1 68.9,23.5 68.9,19.37 v68.58,19.05
  Bottom 0.254: v63.34,27.62 64.14,26.83 v68.74,26.83 | Q5.1 v68.58,19.05 67.31,17.78 61.91,17.78 61.12,16.99 48.1,16.99 47.78,17.3 44.93,17.3 44.61,16.99 34.13,16.99 v30.16,20.95
PUMP5  (via drill 0.33)
  Top 0.254: U$1.@7 19.53,26.83 19.53,29.21 U$1.7 19.53,29.37 19.53,31.75 U$1.#7 19.53,31.91 20.95,33.34 20.95,35.56 21.91,36.51 v21.91,39.37 | GPIO_HEADER1.18 65.25,47.15 v65.25,42.7 | v80.33,40.48 81.12,39.69 81.12,34.61 87.63,28.1 87.63,24.13 | 87.63,24.13 Q6.1 | 87.63,24.13 R6.1 | v58.74,40.8 v56.99,39.05
  Bottom 0.254: v80.33,40.48 77.95,40.48 76.68,41.75 66.2,41.75 v65.25,42.7 65.25,42.55 64.14,41.43 59.37,41.43 v58.74,40.8 | v21.91,39.37 22.23,39.05 38.58,39.05 38.89,38.73 56.67,38.73 v56.99,39.05
PUMP6  (via drill 0.33)
  Top 0.254: U$1.#6 16.99,31.75 16.99,29.37 U$1.6 16.99,29.21 16.99,26.83 U$1.@6 16.99,26.67 18.26,25.4 23.18,25.4 23.18,22.54 25.4,20.32 25.4,17.78 26.19,16.99 32.7,16.99 32.7,17.46 34.13,18.89 36.83,18.89 36.83,16.35 v37.78,15.4 | Q7.1 101.76,21.43 101.76,24.13 R7.1 101.6,24.13 101.6,36.2 98.27,39.53 v98.27,50.8 | v43.81,12.54 v42.55,13.81 | v64.61,10.32 65.56,9.37 65.56,6.19 66.2,5.56 80.8,5.56 v80.8,22.7
  Bottom 0.254: v98.27,50.8 97.95,51.12 77.31,51.12 76.04,49.85 70.64,49.85 69.22,48.42 GPIO_HEADER1.22 | v37.78,15.4 39.37,13.81 v42.55,13.81 | v43.81,12.54 44.13,12.86 62.07,12.86 v64.61,10.32 | v80.8,22.7 80.96,22.86 100.33,22.86 101.6,24.13 R7.1
PUMP7  (via drill 0.33)
  Top 0.254: Q8.1 120.65,24.13 R8.1 | U$1.@5 14.45,26.83 14.45,29.21 U$1.5 14.45,29.37 14.45,31.75 U$1.#5 14.45,31.91 15.24,32.7 15.24,35.56 v18.41,38.73 | v39.05,47.15 35.72,43.81 v35.72,38.1 | v84.61,40.16 v87,42.55 | v53.02,40.32 52.7,40.64 52.7,44.45 GPIO_HEADER1.7
  Bottom 0.254: GPIO_HEADER1.7 50.64,46.51 49.85,46.51 49.21,47.15 v39.05,47.15 | v35.72,38.1 35.4,38.42 18.73,38.42 v18.41,38.73 | v87,42.55 89.53,42.55 90.65,41.43 103.03,41.43 106.36,38.1 125.25,38.1 125.25,34.13 123.67,32.54 123.03,32.54 123.03,30.16 120.81,27.94 120.81,24.13 R8.1 | v84.61,40.16 81.28,40.16 80.64,39.53 67.94,39.53 67.63,39.85 57.31,39.85 56.83,40.32 v53.02,40.32
PUMPLEDS  (via drill 0.33)
  Top 0.254: v21.91,34.13 23.02,35.24 Q10.2 | v13.81,36.83 13.81,40.01 R9.2 | U$1.@16 24.61,44.61 24.61,46.99 U$1.16 24.61,47.15 24.61,49.53 U$1.#16 24.61,49.69 24.61,51.12 | GPIO_HEADER1.24 68.9,51.12 24.61,51.12 | v10.48,40.32 7.62,43.18 2.86,43.18 2.86,50.32 3.65,51.12 24.61,51.12
  Bottom 0.254: v21.91,34.13 21.59,33.81 16.99,33.81 13.97,36.83 v13.81,36.83 | v10.48,40.32 13.65,40.32 13.81,40.16 R9.2
RESET  (via drill 0.33)
  Top 0.254: v73.18,27.3 73.18,30.16 U1.29 | JP3.5 91.76,45.4 v91.76,29.21
  Bottom 0.254: R12.2 64.77,25.24 65.41,25.88 71.75,25.88 v73.18,27.3 74.14,27.3 75.72,28.89 91.44,28.89 v91.76,29.21
RGBLED1  (via drill 0.33)
  Top 0.254: U$1.@20 14.45,44.61 14.45,46.99 U$1.20 14.45,47.15 14.45,49.53 U$1.#20 | v33.81,40.01 33.81,37.78 30.48,37.78 Q9.2
  Bottom 0.254: v33.81,40.01 33.18,40.64 R11.2 22.7,40.64 21.43,41.91 16.99,41.91 14.45,44.45 U$1.@20
SCK  (via drill 0.33)
  Top 0.254: v69.69,42.7 68.26,41.27 68.26,37.62 68.42,37.47 U1.17 | JP3.3 v85.41,42.23
  Bottom 0.254: v69.69,42.7 69.85,42.86 78.11,42.86 78.74,42.23 v85.41,42.23
TEMPSENSOR1  (via drill 0.33)
  Top 0.254: U$1.@17 22.07,44.61 22.07,46.99 U$1.17 22.07,47.15 22.07,49.53 U$1.#17 | v77.79,41.91 77.95,42.07 77.95,48.42 78.11,48.58 78.11,49.53 76.83,50.8 v70.48,50.8
  Bottom 0.254: v77.79,41.91 78.11,41.59 80.49,41.59 80.8,41.27 88.9,41.27 U$2.2 | v70.48,50.8 70.17,51.12 23.5,51.12 22.07,49.69 U$1.#17
VDDA
  Top 0.254: U$1.@22 9.37,44.61 9.37,46.99 U$1.22 9.37,47.15 9.37,49.53 U$1.#22
VIN12
  Top 0.254: UNIT7.1 118.11,9.53 D8.C 118.11,29.05 119.54,30.48 J1.PWR | UNIT2.1 35.56,9.53 D3.C | UNIT0.1 2.54,9.53 D1.C | UNIT1.1 19.05,9.53 D2.C | UNIT5.1 85.09,9.53 D6.C | UNI3.1 52.07,9.53 D4.C | UNIT4.1 68.58,9.53 D5.C
  Bottom 0.254: D9.A 118.11,30.48 J1.PWR | 102.08,13.81 102.08,15.24 D7.C 100.17,16.67 94.61,16.67 93.34,15.4 85.09,15.4 D6.C 83.66,16.67 67.31,16.67 67.23,16.59 | 102.08,13.81 102.08,9.05 UNIT6.1 | 102.08,13.81 116.68,13.81 D8.C | D1.C 3.97,13.81 17.62,13.81 17.7,13.89 | D2.C 17.7,13.89 | 17.7,13.89 17.78,13.81 34.13,13.81 D3.C 36.67,16.35 44.77,16.35 45.09,16.67 47.62,16.67 48.9,15.4 52.07,15.4 D4.C 53.18,16.35 61.28,16.35 61.59,16.67 67.15,16.67 67.23,16.59 | D5.C 67.23,16.59
  Bottom 0.61: 102.87,8.89 UNIT6.1
VOUTPUMP0
  Top 0.254: UNIT0.8 12.7,12.06 D1.A
  Bottom 0.254: Q1.2 11.43,15.24 D1.A
VOUTPUMP1
  Top 0.254: UNIT1.8 29.21,12.06 D2.A
  Bottom 0.254: Q2.2 27.94,15.24 D2.A
VOUTPUMP2
  Top 0.254: Q3.2 44.45,15.24 45.09,15.24 | 45.09,15.24 UNIT2.8 | 45.09,15.24 D3.A
VOUTPUMP3  (via drill 0.33)
  Top 0.254: Q4.2 57.47,18.73 v57.47,15.4 | UNI3.8 62.23,12.06 D4.A
  Bottom 0.254: v57.47,15.4 57.63,15.24 D4.A
VOUTPUMP4
  Top 0.254: Q5.2 77.47,15.24 78.11,15.24 | 78.11,15.24 UNIT4.8 | 78.11,15.24 D5.A
VOUTPUMP5  (via drill 0.33)
  Top 0.254: v93.66,16.99 95.25,15.4 D6.A 95.25,12.06 UNIT5.8
  Bottom 0.254: Q6.2 92.23,16.99 v93.66,16.99
VOUTPUMP6
  Top 0.254: UNIT6.8 111.76,12.06 D7.A
  Bottom 0.254: Q7.2 110.49,15.24 D7.A
VOUTPUMP7
  Bottom 0.254: Q8.2 127,15.24 127.64,15.24 | 127.64,15.24 UNIT7.8 | 127.64,15.24 D8.A

## Text on the board
tPlace: +5V | GND | TX | RX | P1 | P4 | P5 | P6 | GND | +5V | AS5V | 3.3V | P2 | AS2 | +3V3 | RST | +3V3* | GND | D7 | D6 | D5 | D4 | D3 | D2 | D1 | D0 | P7 | P0 | P3 | P1 | P0 | +5V | +5V | EX1 | EX2 | EX3 | GND | P7 | P6 | P5 | P4 | P3 | P2 | +5V/VIN | GND | TX | RX | A7 | A6 | A5 | A4 | A3 | A2 | A1 | A0 | Drinkbot... Mmm Alcohol! <3
bPlace: Drinkbot Prototype 1.0 | Design by Felix | Copyright 2015
tValues: L7805-5V | GND | 0.1uF | ATMEGA328P | 22pf | 0.1uF | +